# EAGLE board pt2399_dev_board_v01 (EAGLE 5.10)
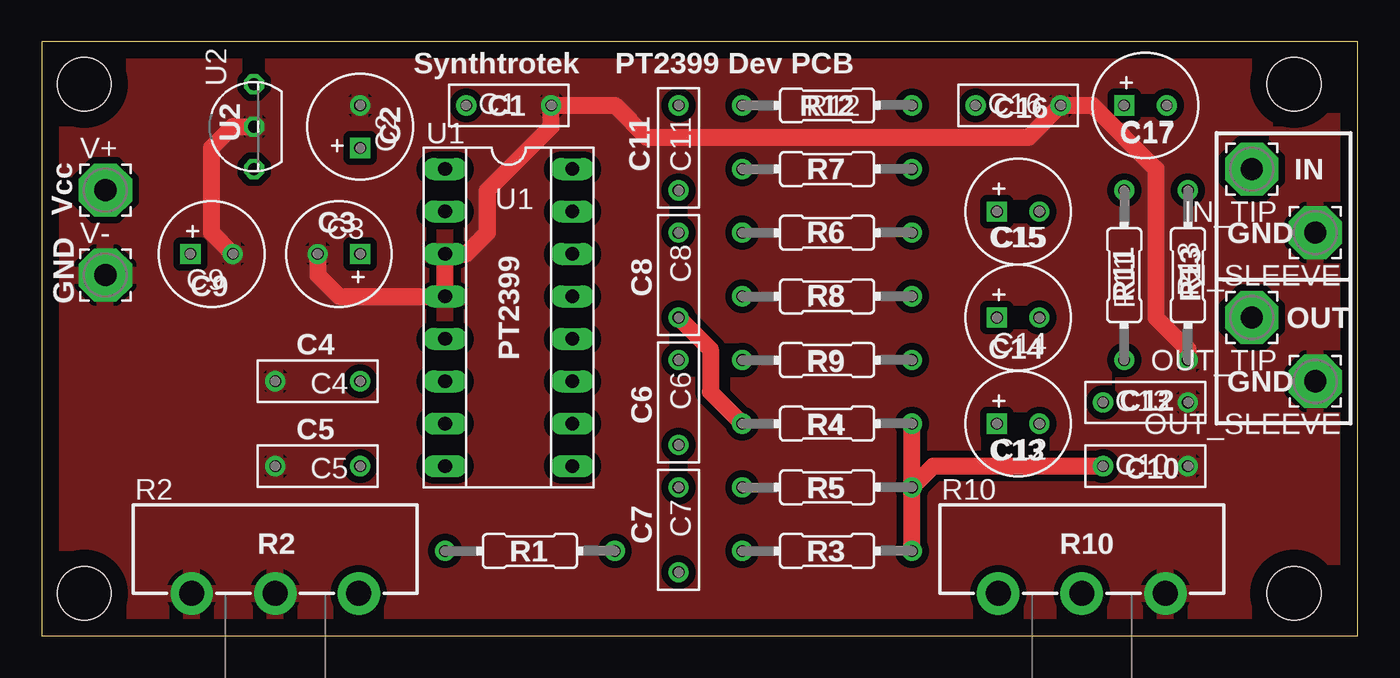
[diagram p0: board, top side]
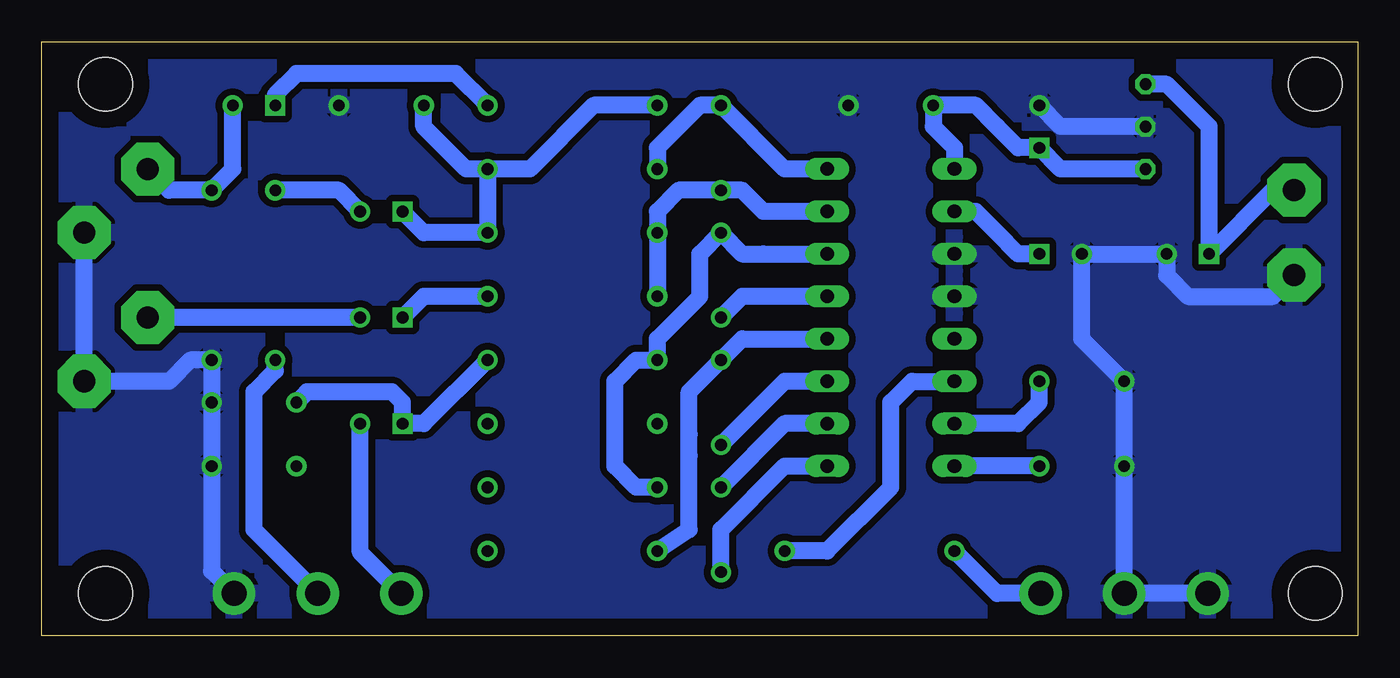
[diagram p1: board, bottom side, seen from below]

Size 78.74 x 35.56 mm. Coordinates in mm from the lower left corner, seen from the top.
Outline: 0,0 78.74,0 78.74,35.56 0,35.56 0,0
Copper layers (1*16): Top 0.035mm / dielectric 1.5mm / Bottom 0.035mm
Design rules "default *": minimum track width 10mil, minimum drill 24mil, track to track 12mil, track to pad 8mil, pad to pad 8mil, via to via 8mil, smd to smd 8mil, copper to edge 40mil, drill to drill 8mil, minimum pad ring 10mil, minimum via ring 8mil, stop-mask expansion 4mil, vias tented up to drill 0mil, thermal gap 10mil
Holes 3.2 mm at 2.54,33.02 74.93,33.02 74.93,2.54 2.54,2.54

## Footprints (pad centres in the part's own frame; a part is rotated, then mirrored left to right if it is on the bottom)
072X025 = drill 0.7 round: 1 -2.54,0; 2 2.54,0
063_025 = drill 0.7 square: + -1.27,0 | drill 0.7 round: - 1.27,0
3,17/1,3 = drill 1.321 pad 3.175 octagon: 1 0,0
R0207/4 = drill 0.7 round: 1 -5.08,0; 2 5.08,0
POT_ALPHA_RV16AF-20 = drill 1.5 pad 2.54 round: 1 -5,0; 2 0,0; 3 5,0
SOCKET-16 = drill 0.813 long: 1 -8.89,-3.81; 2 -6.35,-3.81; 3 -3.81,-3.81; 4 -1.27,-3.81; 5 1.27,-3.81; 6 3.81,-3.81; 7 6.35,-3.81; 8 8.89,-3.81; 9 8.89,3.81; 10 6.35,3.81; 11 3.81,3.81; 12 1.27,3.81; 13 -1.27,3.81; 14 -3.81,3.81; 15 -6.35,3.81; 16 -8.89,3.81
TO92- = drill 0.7 octagon: 1 -2.54,0; 2 0,0; 3 2.54,0

## Placement (x,y rotation side)
C1  0.1uF  [072X025]  27.94,31.75 0 top
C2  100uF  [063_025]  19.05,30.48 90 top
C3  47uF  [063_025]  17.78,22.86 180 top
C4  0.1uF  [072X025]  16.51,15.24 180 top
C5  0.1uF  [072X025]  16.51,10.16 180 top
C6  82nF  [072X025]  38.1,13.97 270 top
C7  82nF  [072X025]  38.1,6.35 270 top
C8  560pF  [072X025]  38.1,21.59 270 top
C9  47uF  [063_025]  10.16,22.86 0 top
C10  3.3nF  [072X025]  66.04,10.16 0 top
C11  560pF  [072X025]  38.1,29.21 270 top
C12  10uF  [063_025]  58.42,12.7 0 top
C13  0.01uF  [072X025]  66.04,13.97 0 top
C14  10uF  [063_025]  58.42,19.05 0 top
C15  4.7uF  [063_025]  58.42,25.4 0 top
C16  3.9n  [072X025]  58.42,31.75 0 top
C17  4.7uF  [063_025]  66.04,31.75 0 top
IN_SLEEVE  [3,17/1,3]  76.2,24.13 180 top
IN_TIP  [3,17/1,3]  72.39,27.94 180 top
OUT_SLEEVE  [3,17/1,3]  76.2,15.24 180 top
OUT_TIP  [3,17/1,3]  72.39,19.05 180 top
R1  1k  [R0207/4]  29.21,5.08 0 top
R2  20k  [POT_ALPHA_RV16AF-20]  13.97,2.54 0 top
R3  10k  [R0207/4]  46.99,5.08 0 top
R4  10k  [R0207/4]  46.99,12.7 0 top
R5  15k  [R0207/4]  46.99,8.89 0 top
R6  10k  [R0207/4]  46.99,24.13 0 top
R7  10k  [R0207/4]  46.99,27.94 0 top
R8  4.7k  [R0207/4]  46.99,20.32 0 top
R9  5.6k  [R0207/4]  46.99,16.51 0 top
R10  50k  [POT_ALPHA_RV16AF-20]  62.23,2.54 0 top
R11  18k  [R0207/4]  64.77,21.59 270 top
R12  15k  [R0207/4]  46.99,31.75 0 top
R13  100k  [R0207/4]  68.58,21.59 90 top
U1  PT2399  [SOCKET-16]  27.94,19.05 270 top
U2  LM7805  [TO92-]  12.7,30.48 90 top
V+  [3,17/1,3]  3.81,26.67 0 top
V-  [3,17/1,3]  3.81,21.59 0 top

## Library data of the parts
C1 C4-C8 C10 C11 C13 C16 = gm-caps-film-box
C2 C3 C9 C12 C14 C15 C17 = gm-caps-electro-pol
IN_SLEEVE IN_TIP OUT_SLEEVE OUT_TIP V+ V- = wirepad
R1 R3-R9 R11-R13 = gm-resistors
R2 R10 = SparkFun
U1 = ic-package
U2 = gm-regulators

## Nets
C5*: C5.1 U1.8
GND: C1.2 C2.- C3.- C4.2 C5.2 C9.- C10.2 C13.2 C16.2 IN_SLEEVE.1 OUT_SLEEVE.1 R2.1 R2.2 R10.3 R13.1 U1.3 U1.4 U2.2 V-.1
IN: C17.- IN_TIP.1 R13.2
N$1: C17.+ R12.2
N$2: C4.1 U1.7
N$3: C7.2 U1.9
N$4: C7.1 U1.10
N$5: C10.1 R3.2 R4.2 R5.2
N$6: C6.1 R3.1 U1.12
N$7: R1.2 U1.6
N$8: R1.1 R2.3
N$9: C3.+ U1.2
N$10: R10.2 R11.2
N$12: C8.2 R4.1 U1.13
N$14: C11.2 R6.1 R8.1 U1.15
N$15: C11.1 R7.1 U1.16
N$16: C12.+ C13.1 R9.2
N$17: C6.2 U1.11
N$19: C12.- R10.1
N$20: C15.+ C16.1 R6.2 R7.2 R12.1
N$21: C15.- R11.1
N$25: C14.+ R8.2
N$26: C8.1 R5.1 R9.1 U1.14
N$34: C9.+ U2.3 V+.1
OUT: C14.- OUT_TIP.1
VA: C1.1 C2.+ U1.1 U2.1

## Tracks (layer width: path | path; a pad name or v marks a point on that pad's centre or on a via)
C5*
  Bottom 1.016: C5.1 U1.8
GND
  Top 1.016: U2.2 11.43,30.48 10.16,29.21 10.16,24.13 C9.- | C3.- 16.51,21.59 17.78,20.32 U1.4 U1.3 25.4,22.86 26.67,24.13 26.67,26.67 30.48,30.48 C1.2 34.29,31.75 36.2,29.84 59.05,29.84 C16.2 62.87,31.75 66.67,27.94 66.67,19.05 68.58,17.14 R13.1
  Bottom 1.016: R2.1 R2.2 C4.2 16.51,17.78 C3.- C9.- 11.43,21.59 10.16,20.32 5.08,20.32 V-.1 | U2.2 17.78,30.48 C2.- | R10.3 68.58,3.89 C10.2 C13.2 R13.1 69.85,16.51 71.12,15.24 OUT_SLEEVE.1 | OUT_SLEEVE.1 76.83,15.24 OUT_SLEEVE.1 | OUT_SLEEVE.1 IN_SLEEVE.1
  pour Top (isolate 0.406): 0.64,35.56 78.74,35.56 78.74,0 0,0 0,35.56
  pour Bottom (isolate 0.406): 0,35.56 78.74,35.56 78.74,0 0,0
IN
  Bottom 1.016: C17.- 67.31,27.94 R13.2 71.12,26.67 IN_TIP.1
N$1
  Bottom 1.016: C17.+ 64.77,32.38 63.5,33.66 53.98,33.66 R12.2
N$2
  Bottom 1.016: C4.1 19.05,13.97 20.32,12.7 U1.7
N$3
  Bottom 1.016: U1.9 34.29,10.16 38.1,6.35 C7.2
N$4
  Bottom 1.016: U1.10 34.29,12.7 C7.1
N$5
  Top 1.016: C10.1 53.34,10.16 R5.2 | R5.2 R4.2 | R3.2 R5.2
N$6
  Bottom 1.016: U1.12 36.83,17.78 C6.1 40.01,14.61 40.01,12.06 40.01,10.79 40.01,6.35 R3.1
N$7
  Bottom 1.016: U1.6 26.67,15.24 27.94,13.97 27.94,8.89 31.75,5.08 R1.2
N$8
  Bottom 1.016: R1.1 21.59,2.54 R2.3
N$9
  Bottom 1.016: C3.+ 20.32,22.86 21.59,24.13 22.86,25.4 U1.2
N$10
  Bottom 1.016: R11.2 64.77,15.88 66.04,14.61 66.04,6.35 R10.2
N$12
  Top 1.016: C8.2 40.01,17.14 40.01,14.61 R4.1
  Bottom 1.016: C8.2 36.83,20.32 U1.13
N$14
  Bottom 1.016: U1.15 35.56,25.4 36.83,26.67 C11.2 40.64,26.67 41.91,25.4 R6.1 R8.1
N$15
  Bottom 1.016: U1.16 34.29,27.94 C11.1 39.37,31.75 40.64,30.48 41.91,29.21 R7.1
N$16
  Bottom 1.016: R9.2 55.88,12.7 C12.+ 57.15,13.97 57.78,14.61 62.87,14.61 C13.1
N$17
  Bottom 1.016: C6.2 34.29,15.24 U1.11
N$19
  Bottom 1.016: C12.- 59.69,5 R10.1
N$20
  Bottom 1.016: R7.2 R6.2 55.88,24.13 C15.+ | R12.1 45.72,31.75 49.53,27.94 R7.2 | R7.2 53.34,27.94 55.88,30.48 C16.1
N$21
  Bottom 1.016: R11.1 60.96,26.67 C15.-
N$25
  Bottom 1.016: R8.2 55.88,20.32 C14.+
N$26
  Bottom 1.016: U1.14 35.56,22.86 36.83,22.86 C8.1 39.37,22.86 39.37,20.32 41.91,17.78 R9.1 43.18,16.51 44.45,15.24 44.45,10.16 43.18,8.89 R5.1
N$34
  Bottom 1.016: V+.1 5.08,26.67 C9.+ 8.89,30.48 11.43,33.02 U2.3
OUT
  Bottom 1.016: C14.- OUT_TIP.1
VA
  Bottom 1.016: U2.1 17.78,27.94 C2.+ 20.32,29.21 21.59,30.48 22.86,31.75 C1.1 25.4,30.48 24.13,29.21 U1.1

## Text on the board
tPlace: Synthtrotek | PT2399 Dev PCB | C2 | C1 | R12 | C16 | U2 | C17 | C11 | R7 | IN | U1 | Vcc | C3 | R6 | C15 | GND | GND | C9 | C8 | R8 | R11 | R13 | OUT | C4 | PT2399 | C14 | R9 | C12 | GND | C6 | C5 | R4 | C10 | C13 | R5 | C7 | R2 | R10 | R1 | R3